# Altium PCB ECE453_PWR.PcbDoc
Units mil, origin at the board's own origin, x right, y up, seen from the top; angles counter-clockwise.
Board outline 1800 x 1300 mil, 2 copper layers (Top Layer, Bottom Layer); 19 components, 12 nets, 79 pads, 21 vias.
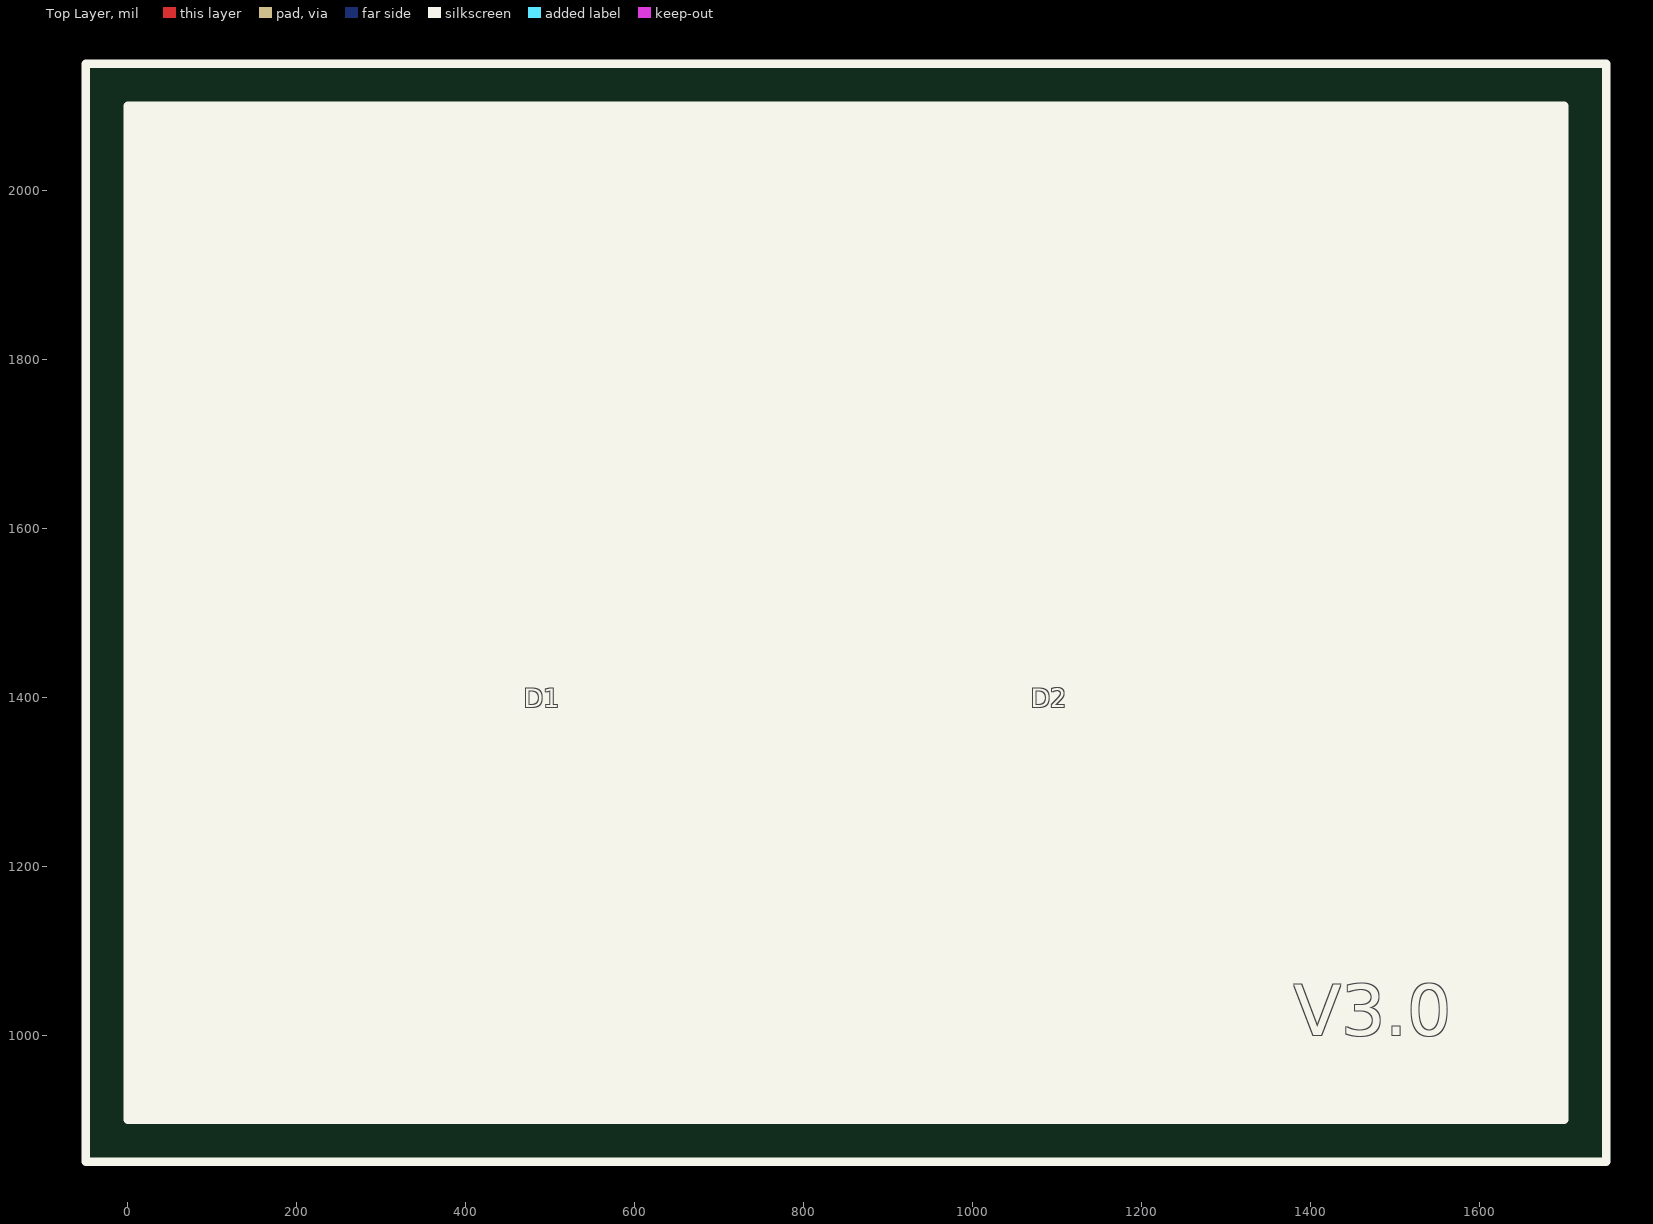
[diagram p0: Top Layer view]
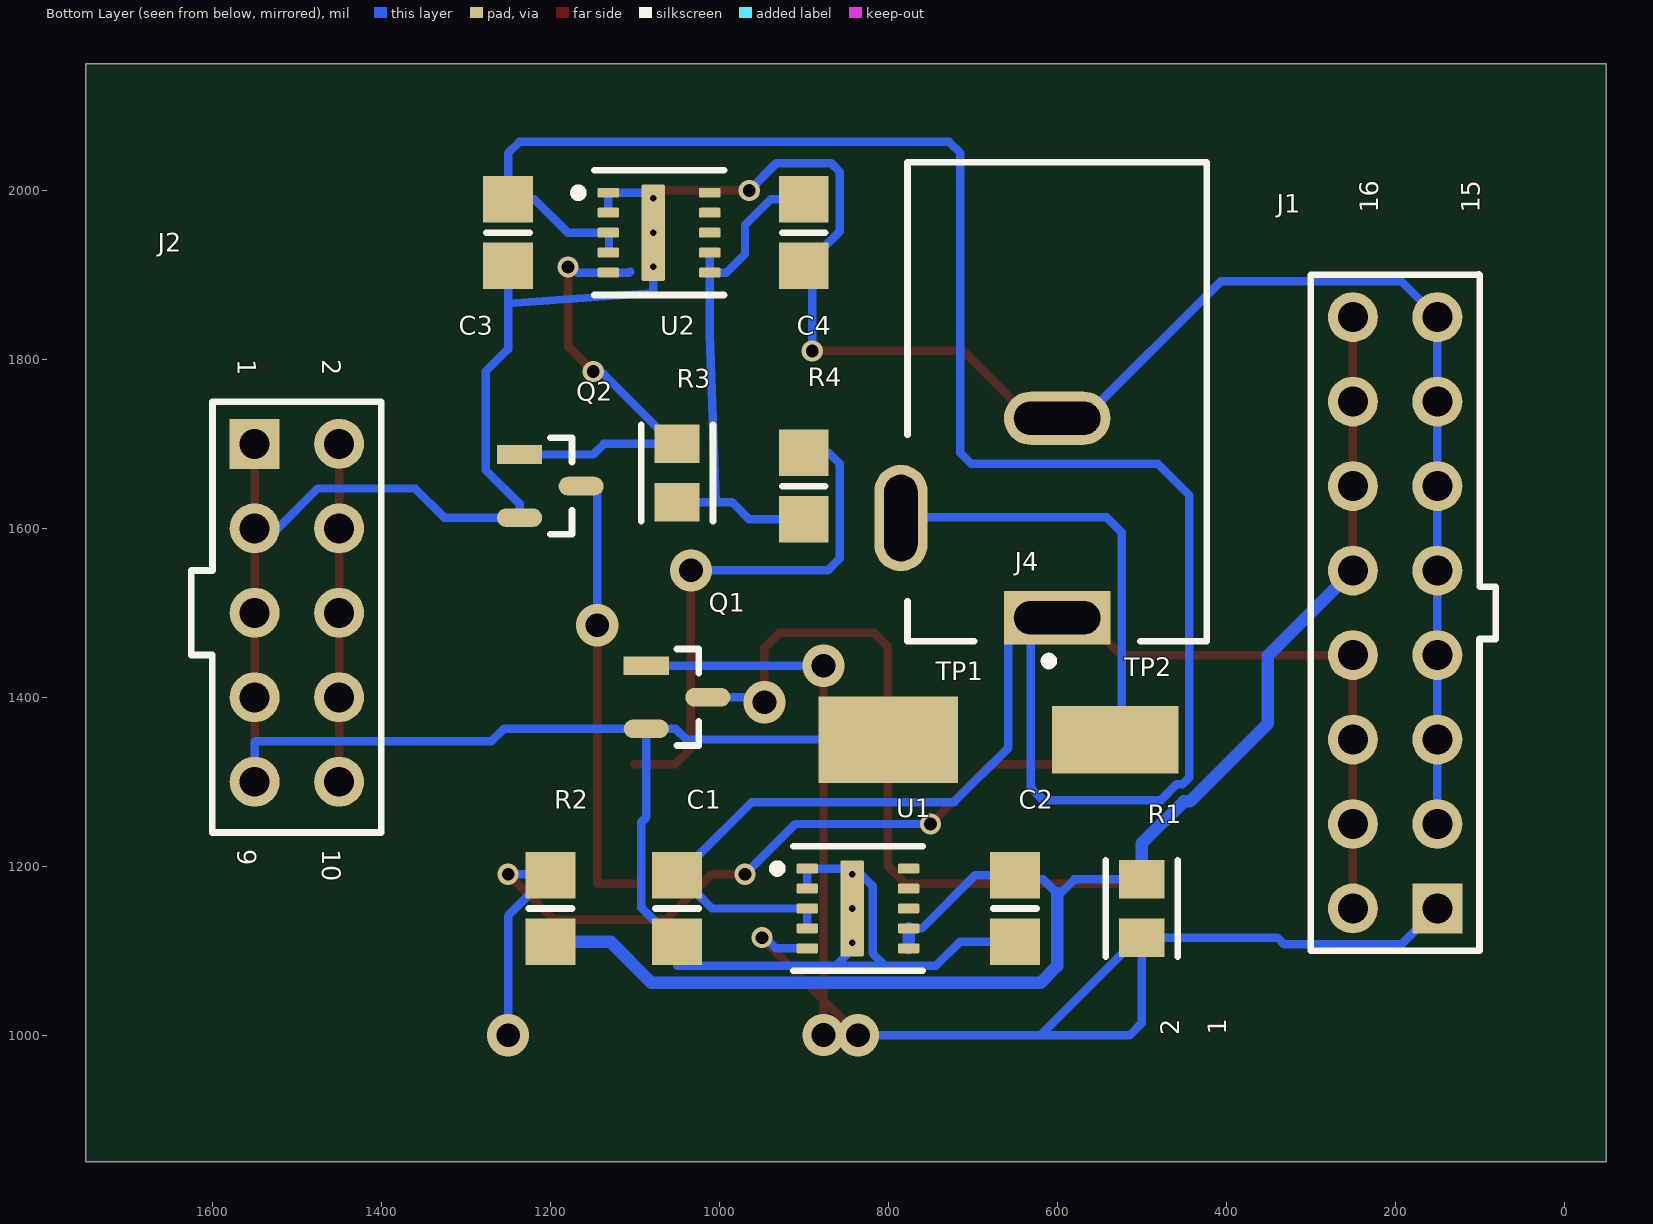
[diagram p1: Bottom Layer view, seen from below]
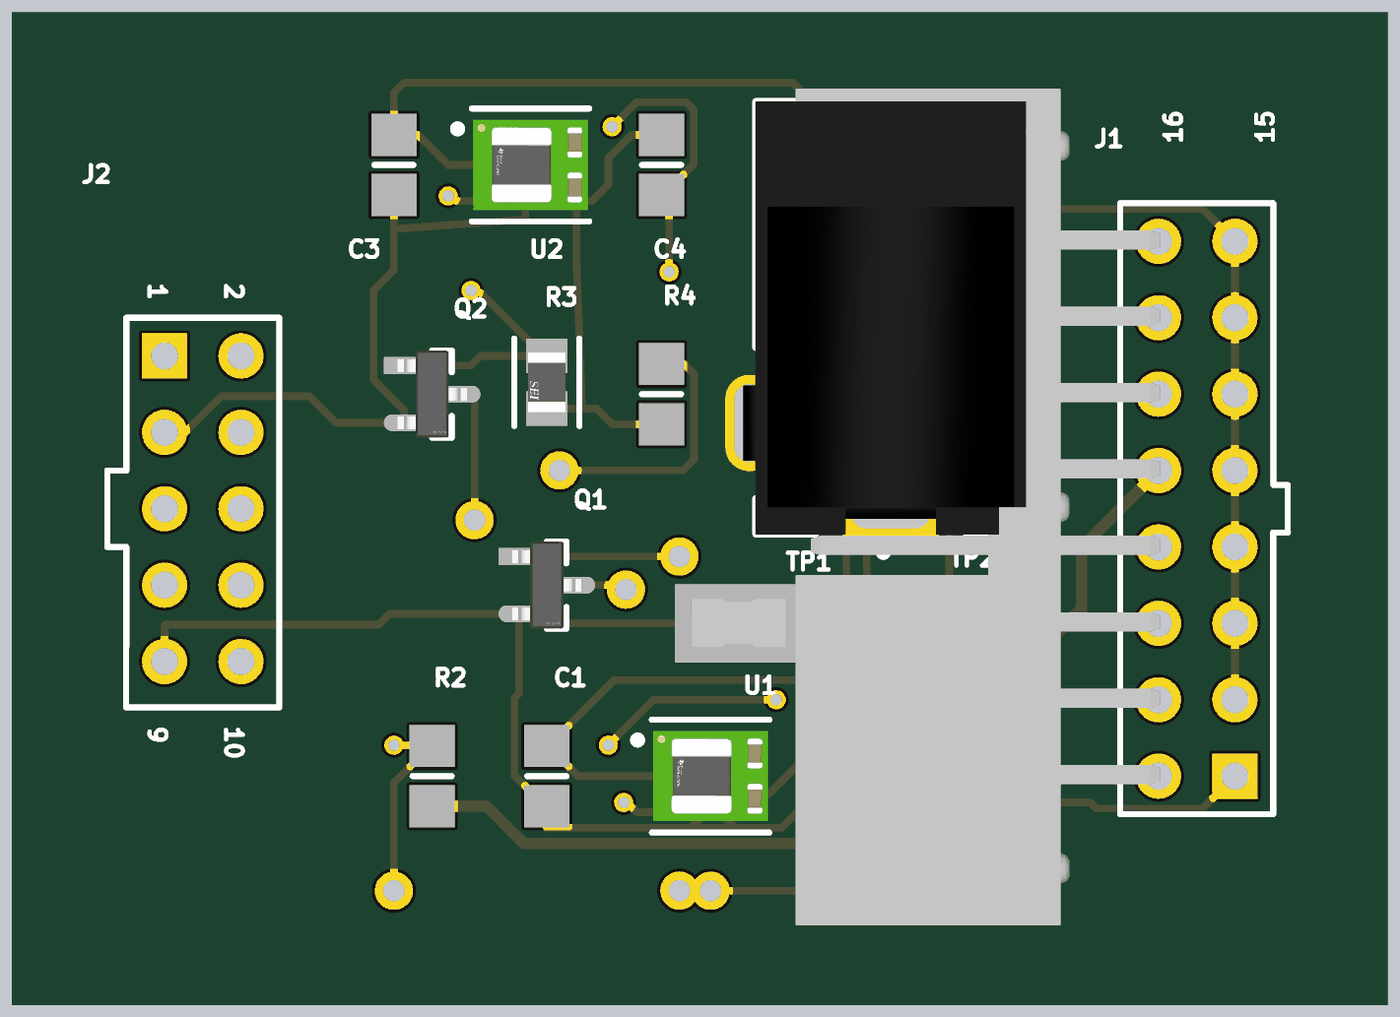
[diagram p2: 3D render of the assembled board from below, using the file's embedded part models]

## Layer stack, top to bottom
Top Solder: solder mask 0.4, Solder Resist, Dk 3.5
Top Layer: signal copper 1.4
Dielectric1: dielectric 12.6, FR-4, Dk 4.8
Bottom Layer: signal copper 1.4
Bottom Solder: solder mask 0.4, Solder Resist, Dk 3.5

## Board outline
-50,850 -50,2150 1750,2150 1750,850

## Design rules (kind name [scope] priority, off if disabled: settings)
Clearance Polygon_Clearance [All vs InPolygon] p1: gap=20 ignorepadtopadclearanceinfootprint=FALSE except(0: Arc-Hole Track-Hole SMDPad-Hole THPad-Hole Via-Hole Fill-Hole Poly-Hole Region-Hole Text-Hole)
Clearance [All] p2: gap=7.87 ignorepadtopadclearanceinfootprint=FALSE except(0: Arc-Hole Track-Hole SMDPad-Hole THPad-Hole Via-Hole Fill-Hole Poly-Hole Region-Hole Text-Hole)
ComponentClearance [InComponent('U3')] p1: gap=0 collisioncheckmode=3 verticalgap=10 showdistances=FALSE
Height [All] p1: minheight=0 maxheight=866.14 prefheight=500
HoleSize [All] p1: absolutevalues=TRUE maxlimit=250 minlimit=1.18 maxpercent=80.000 minpercent=20.000
MinimumSolderMaskSliver [All] p1: minsoldermaskwidth=7
NetAntennae NetAntennae_5.0V [InNet('5.0V')] p1: netantennaetolerance=0
NetAntennae NetAntennae_3.3V [InNet('3.3V')] p2: netantennaetolerance=0
PolygonConnect [IsNamedPolygon('5.0V_L01_P047') vs IsVia] p1: connectstyle=Relief reliefconductorwidth=10 reliefentries=4 polygonreliefangle="90 Angle" airgapwidth=10
PolygonConnect PolygonConnect_1 [All] p2: connectstyle=Relief reliefconductorwidth=10 reliefentries=4 polygonreliefangle="90 Angle" airgapwidth=10
RoutingVias [All] p1: holewidth=28 width=50 viastyle="Through Hole" minholewidth=15 minwidth=25 maxholewidth=28 maxwidth=50
SilkToSolderMaskClearance [IsPad] p1: minsilkscreentomaskgap=6 clearancetoexposedcopper=TRUE
SolderMaskExpansion [All] p1: expansion=4 istentingtop=FALSE
Width [All] p1: maxlimit=472.44 minlimit=3.94 preferedwidth=10 minimp=50.000000 maximp=50.000000 favimp=50.000000
24 further rules are at their usual default settings.

## Components (designator, comment, footprint, x,y, rotation, side; value= is the part's Value field where it differs from the comment)
C1 "Cap" 6-0805_M 1050,1150 r90 bottom value=10uF
C2 "Cap" 6-0805_M 650,1150 r90 bottom value=47uF
C3 "Cap" 6-0805_M 1250,1950 r90 bottom value=10uF
C4 "Cap" 6-0805_M 900,1950 r90 bottom value="47uF 2.1mOhm"
D1 "LTST-C230KGKT" Lite-On_LTST-C230KGKT_0 500,1250 r90 top
D2 "LTST-C230KGKT" Lite-On_LTST-C230KGKT_0 1100,1250 r90 top
J1 "CONN_HEADER_MALE_8x2" SBH11-PBPC-D08-ST-BK 200,1500 r90 bottom
J2 "CONN_HEADER_MALE_5x2" SBH11-PBPC-D05-ST-BK 1500,1500 r270 bottom
J4 "PJ-102AH" CUI_PJ-102AH_0 600,1750 r180 bottom
Q1 "2N7002NXAKR" Nexperia_USA_Inc_SOT23_IPC_B 1050,1400 r180 bottom
Q2 "2N7002NXAKR" Nexperia_USA_Inc_SOT23_IPC_B 1200,1650 r180 bottom
R1 "RMCF0805JG10K0" 0805 500,1150 r90 bottom
R2 "Res1" 6-0805_M 1200,1150 r270 bottom value=330
R3 "RMCF0805JG10K0" 0805 1050,1665.52 r270 bottom
R4 "Res1" 6-0805_M 900,1650 r270 bottom value=330
TP1 "TP_1206" TP-SMC-1206 800,1350 r180 bottom
TP2 "5019" KSTN-5019_V 531.5,1350 r0 bottom
U1 "LMZM23601V3SILT" Texas_Instruments_SIL0010A_MFG 835.83,1150 r180 bottom
U2 "LMZM23601V5SILT" Texas_Instruments_SIL0010A_MFG 1071.26,1950 r180 bottom

## Footprints (in the part's own frame and the unit in brackets; to place one, negate y for a bottom-side part, rotate by r counter-clockwise, add the part's x,y. Pads: shape width x height; smd on the part's side, far side on the other; paste and mask are expansions set on the pad)
6-0805_M [mm] "Chip Resistor, Body 2.0x1.2mm, IPC Low Density"
  rect 1.4x1.5 smd: 1(-1,0) 2(1,0)
  silkscreen extent 0,-0.65 0,0.65, body extent -1.07,-0.7 1.07,0.7, height 0.7
0805 [mil]
  rect 45.46x53.63 smd paste+0 mask+0: 1(-34.48,0) 2(34.48,0)
  silkscreen extent -57,-43 57,43, body extent -39,-25 39,25, height 26
CUI_PJ-102AH_0 [mm]
  rect 3.2x1.6 hole 1 slot 2.6 at 0 deg paste-1000 mask+0: 1(0,-6.5)
  oval 3.2x1.6 hole 1 slot 2.6 at 0 deg paste-1000 mask+0: 2(0,-0.5)
  oval 1.6x3.2 hole 2.6 slot 1 at 0 deg paste-1000 mask+0: 3(-4.7,-3.5)
  silkscreen extent -4.5,-7.92 4.5,7.2, body extent -4.9,-7.21 4.5,7.19, height 11.02
KSTN-5019_V [mm] "Test Point, 1-Leads, Body 3.81x2.03mm"
  rect 3.8x2.03 smd: 1(0,0)
  body extent -1.91,-1.02 1.9,1.02, height 2.29
Lite-On_LTST-C230KGKT_0 [mm]
  rect 1.5x1.6 smd paste+0 mask+0: 1(-1.8,0) 2(1.8,0)
  silkscreen extent -3.26,-0.8 0.5,0.8, body extent -1.6,-0.8 1.6,0.8, height 1.2
Nexperia_USA_Inc_SOT23_IPC_B [mm]
  rect 1.355x0.562 smd paste+0 mask+0: 1(-0.925,0.95)
  rrect100% 1.355x0.562 smd paste+0 mask+0: 2(-0.925,-0.95) 3(0.926,0)
  silkscreen extent 0,-1.45 0.65,1.45, body extent -1.15,-1.45 1.15,1.45, height 1.1
SBH11-PBPC-D05-ST-BK [mm] "Connector; Header; 5x2 Position"
  rect 1.5x1.5 hole 0.9: 1(-5.08,-1.27)
  round 1.5 hole 0.9: 2(-5.08,1.27) 3(-2.54,-1.27) 4(-2.54,1.27) 5(0,-1.27) 6(0,1.27) 7(2.54,-1.27) 8(2.54,1.27) 9(5.08,-1.27) 10(5.08,1.27)
  silkscreen extent -6.35,-3.18 6.6,2.54, body extent -10.1,-4.45 10.1,4.65, height 8.95
SBH11-PBPC-D08-ST-BK [mm] "Connector; Header; 8x2 Position"
  rect 1.5x1.5 hole 0.9: 1(-8.89,-1.27)
  round 1.5 hole 0.9: 2(-8.89,1.27) 3(-6.35,-1.27) 4(-6.35,1.27) 5(-3.81,-1.27) 6(-3.81,1.27) 7(-1.27,-1.27) 8(-1.27,1.27) 9(1.27,-1.27) 10(1.27,1.27) 11(3.81,-1.27) 12(3.81,1.27) 13(6.35,-1.27) 14(6.35,1.27) 15(8.89,-1.27) 16(8.89,1.27)
  silkscreen extent -10.16,-3.03 10.17,2.54, body extent -13.85,-4.47 13.97,4.63, height 9.3
Texas_Instruments_SIL0010A_MFG [mm]
  rrect33% 0.65x0.3 smd paste+0 mask+0: 1(-1.525,1.2) 2(-1.525,0.6) 3(-1.525,0) 4(-1.525,-0.6) 5(-1.525,-1.2) 6(1.525,-1.2) 7(1.525,-0.6) 8(1.525,0) 9(1.525,0.6) 10(1.525,1.2)
  rrect14% 0.7x2.9 smd paste-1000 mask+0: 11(-0.175,0)
  silkscreen extent -2.55,-1.87 1.95,1.88, body extent -1.9,-1.5 1.9,1.5, height 1.58
TP-SMC-1206 [mm] "Surface mount test point 1206"
  rect 4.2x2.6 smd mask+0: 1(0,0)
  body extent -1.57,-0.79 1.63,0.81, height 1.22

## Part data
C1 C3: "Capacitor", Supplier Part Number 1=399-4925-1-ND, LatestRevisionDate=17-Jul-2002, LatestRevisionNote="Re-released for DXP Platform.", PackageDescription="Radial Cap, Thru-Hole; 2 Leads; 0.3 in Pin Spacing", PackageReference=RAD-0.3, Published=8-Jun-2000, Publisher="Altium Limited", Supplier 1=Digi-Key
C2 C4: "Capacitor", Supplier Part Number 1=587-1779-1-ND, LatestRevisionDate=17-Jul-2002, LatestRevisionNote="Re-released for DXP Platform.", PackageDescription="Radial Cap, Thru-Hole; 2 Leads; 0.3 in Pin Spacing", PackageReference=RAD-0.3, Published=8-Jun-2000, Publisher="Altium Limited", Supplier 1=Digi-Key
D1 D2: "LED GREEN CLEAR CHIP SMD", Case Code (Imperial)=1206, Case Code (Metric)=3216, Color=Green, Forward Current=30mA, Forward Voltage=2V, Lens Color=Colorless, Manufacturer="Vishay Lite-On", Max Operating Temperature=85°C, Min Operating Temperature=-55°C, Package Quantity=1, Power Dissipation=75mW, Reverse Voltage=5V, Supplier Part Number 1=160-1456-1-ND, Test Current=20mA, Case/Package=1206, Category=LEDs, ComponentLink1Description=https://datasheet.ciiva.com/15118/getdatasheetpartid-214545-15118102.pdf?src-supplier=Verical, ComponentLink1URL=https://datasheet.ciiva.com/15118/getdatasheetpartid-214545-15118102.pdf?src-supplier=Verical, ComponentLink2Description=https://datasheet.ciiva.com/12400/lite-on-ltst-c230kgkt-190174-12400698.pdf?src-supplier=Mouser, ComponentLink2URL=https://datasheet.ciiva.com/12400/lite-on-ltst-c230kgkt-190174-12400698.pdf?src-supplier=Mouser, ComponentLink3Description=https://datasheet.ciiva.com/11773/0900766b80dc057a-11773900.pdf?src-supplier=RSComponents, ComponentLink3URL=https://datasheet.ciiva.com/11773/0900766b80dc057a-11773900.pdf?src-supplier=RSComponents, ComponentLink4Description=https://datasheet.ciiva.com/2110/s-110-ltst-c230kgkt-2110033.pdf?src-supplier=Digi-Key, ComponentLink4URL=https://datasheet.ciiva.com/2110/s-110-ltst-c230kgkt-2110033.pdf?src-supplier=Digi-Key, ComponentLink5Description=https://datasheet.ciiva.com/2110/s-110-ltst-c230kgkt-2110034.pdf?src-supplier=Digi-Key, ComponentLink5URL=https://datasheet.ciiva.com/2110/s-110-ltst-c230kgkt-2110034.pdf?src-supplier=Digi-Key, ComponentLink6Description=https://datasheet.ciiva.com/2110/s-110-ltst-c230kgkt-2110035.pdf?src-supplier=Digi-Key, ComponentLink6URL=https://datasheet.ciiva.com/2110/s-110-ltst-c230kgkt-2110035.pdf?src-supplier=Digi-Key, Depth=1.6mm, Dominant Wavelength=571nm, Height=1.1mm, Illumination Color=Green, Lead Free="Lead Free", Length=3.2mm, Lens Style=Diffused,Colorless,Clear,Rectangular, Lens Transparency=Clear, Luminous Intensity=35mcd, Manufacturer Part Number=LTST-C230KGKT, Mount="Surface Mount", Number of Elements=1, Number of LEDs=1, Number of Pins=2, Packaging="Tape and Reel", Power Rating=75mW, Pricing 1="1=0.31000, 10=0.16700, 100=0.07740, 500=0.07140, 1000=0.05593 (USD)", Radiation Hardening=No, RoHS=Yes, RoHS Compliant=Yes, Stock 1=244034, Supplier 1=Digi-Key, Viewing Angle=130°, Wavelength=574nm, Width=1.6mm
J1: "CONN HEADER 2.54MM 16POS GOLD", Color=Black, Manufacturer="Sullins Connector Solutions", Manufacturer Part Number=SBH11-PBPC-D08-ST-BK, Supplier Part Number 1=S9171-ND, Category="Connectors, Interconnects", ComponentLink1Description=http://sullinscorp.com/catalogs/145_PAGE118_.100_SBH11_SERIES_MALE_BOX_HDR_ST_RA_SMT.pdf, ComponentLink1URL=http://sullinscorp.com/catalogs/145_PAGE118_.100_SBH11_SERIES_MALE_BOX_HDR_ST_RA_SMT.pdf, Connector Type="Header, Shrouded", Contact Finish=Gold, Contact Finish Thickness=Flash, Contact Mating Length=-, Contact Type="Male Pin", Fastening Type=-, Features="Polarizing Key", Mounting Type="Through Hole", Number of Positions=16, Number of Positions Loaded=All, Number of Rows=2, Packaging=Tray, Part Status=Active, Pitch="0.100\" (2.54mm)", Pricing 1="1=0.55, 10=0.428, 25=0.3988, 50=0.3626, 100=0.3263, 250=0.27552, 500=0.261, 1000=0.232, 2500=0.19285 (USD)", RoHS="RoHS Compliant", Row Spacing="0.100\" (2.54mm)", Stock 1=13784, Supplier 1=Digi-Key, Termination=Solder
J2: "CONN HEADER 2.54MM 10POS GOLD", Color=Black, Manufacturer="Sullins Connector Solutions", Manufacturer Part Number=SBH11-PBPC-D05-ST-BK, Supplier Part Number 1=S9169-ND, Category="Connectors, Interconnects", ComponentLink1Description=http://sullinscorp.com/catalogs/145_PAGE118_.100_SBH11_SERIES_MALE_BOX_HDR_ST_RA_SMT.pdf, ComponentLink1URL=http://sullinscorp.com/catalogs/145_PAGE118_.100_SBH11_SERIES_MALE_BOX_HDR_ST_RA_SMT.pdf, Connector Type="Header, Shrouded", Contact Finish=Gold, Contact Finish Thickness=Flash, Contact Mating Length=-, Contact Type="Male Pin", Fastening Type=-, Features="Polarizing Key", Mounting Type="Through Hole", Number of Positions=10, Number of Positions Loaded=All, Number of Rows=2, Packaging=Tray, Part Status=Active, Pitch="0.100\" (2.54mm)", Pricing 1="1=0.64, 10=0.445, 25=0.3812, 50=0.343, 100=0.2985, 250=0.254, 500=0.2413, 1000=0.2159, 2500=0.17145 (USD)", RoHS="RoHS Compliant", Row Spacing="0.100\" (2.54mm)", Stock 1=29227, Supplier 1=Digi-Key, Termination=Solder
J4: "2.0 x 6.5 mm, 5.0 A, Horizontal, Through Hole, Tapered Pins, Dc Power Jack Connector", Color=Black, Current Rating=5A, Flammability Rating="UL94 V-0", Insulation Resistance=50MR, Manufacturer=CUI, Max Operating Temperature=85°C, Min Operating Temperature=-25°C, Package Quantity=280, Supplier Part Number 1=490-PJ-102AH, Voltage Rating=24V, Category=Connectors, ComponentLink1Description=http://www.mouser.com/ds/2/670/PJ-102AH-524179.pdf?src-supplier=Mouser, ComponentLink1URL=http://www.mouser.com/ds/2/670/PJ-102AH-524179.pdf?src-supplier=Mouser, ComponentLink2Description=https://www.cui.com/product/resource/digikeypdf/pj-102ah.pdf?src-supplier=Digi-Key, ComponentLink2URL=https://www.cui.com/product/resource/digikeypdf/pj-102ah.pdf?src-supplier=Digi-Key, ComponentLink3Description=http://www.cui.com/Product/Resource/FuturePDF/PJ-102AH.pdf?src-supplier=Future+Electronics, ComponentLink3URL=http://www.cui.com/Product/Resource/FuturePDF/PJ-102AH.pdf?src-supplier=Future+Electronics, Connector Type=Jack, Contact Gender=Male, Contact Material=Copper, Contact Plating=Nickel, Diameter=2.1mm, Gender=Male, Housing Color=Black, Housing Material=Thermoplastic, Lead Free="Lead Free", Manufacturer Part Number=PJ-102AH, Mount="Through Hole", Number of Conductors=2, Orientation=Horizontal, Packaging=Bulk, RoHS=Yes, RoHS Compliant=Yes, Series=-, Shielding=Unshielded, Supplier 1=Mouser, Termination="Through Hole"
Q1 Q2: "2N7002NXAK - 60 V, single N-channel Trench MOSFET", Manufacturer=Nexperia, Supplier Part Number 1=1727-8643-1-ND, Manufacturer Part Number=2N7002NXAKR, Pricing 1="1=0.10000, 10=0.05600, 25=0.05360, 100=0.03030, 500=0.02380, 1000=0.01653 (USD)", RoHS=No, Stock 1=74376, Supplier 1=Digi-Key
R1 R3: "Res Thick Film 0805 10K Ohm 5% 1/8W ±200ppm/°C Molded SMD Paper T/R", Case Code (Imperial)=0805, Case Code (Metric)=2012, Manufacturer="Stackpole Electronics", Max Operating Temperature=155°C, Max Power Dissipation=125mW, Min Operating Temperature=-55°C, Package Quantity=10000, Resistance=10kR, Resistor Type="Thick Film", Supplier Part Number 1=RMCF0805JG10K0CT-ND, Temperature Coefficient=200ppm/°C, Tolerance=5%, Case/Package=0805, Category="Chip SMD Resistors", ComponentLink1Description=https://www.seielect.com/catalog/SEI-Packaging.pdf?src-supplier=Digi-Key, ComponentLink1URL=https://www.seielect.com/catalog/SEI-Packaging.pdf?src-supplier=Digi-Key, ComponentLink2Description=https://www.seielect.com/Catalog/SEI-RMCF_RMCP.pdf?src-supplier=Digi-Key, ComponentLink2URL=https://www.seielect.com/Catalog/SEI-RMCF_RMCP.pdf?src-supplier=Digi-Key, ComponentLink3Description=http://www.seielect.com/Catalog/SEI-RMCF_RMCP.pdf?src-supplier=Digi-Key, ComponentLink3URL=http://www.seielect.com/Catalog/SEI-RMCF_RMCP.pdf?src-supplier=Digi-Key, ComponentLink4Description=https://www.seielect.com/catalog/SEI-RMCF_RMCP.pdf?src-supplier=Avnet, ComponentLink4URL=https://www.seielect.com/catalog/SEI-RMCF_RMCP.pdf?src-supplier=Avnet, ComponentLink5Description=http://components.arrow.com/part/dataview/40965385S7746077N1174?src-supplier=Arrow+Electronics, ComponentLink5URL=http://components.arrow.com/part/dataview/40965385S7746077N1174?src-supplier=Arrow+Electronics, Contact Plating=Tin,Matte, Features="Automotive AEC-Q200", Height=0.026inch, Length=0.079inch, Manufacturer Part Number=RMCF0805JG10K0, Mount="Surface Mount", Number of Terminations=2, Packaging="Tape and Reel", Pricing 1="1=0.10000, 10=0.01900, 100=0.00780, 1000=0.00350, 2500=0.00304, 5000=0.00251 (USD)", Radiation Hardening=No, RoHS=Yes, RoHS Compliant=Yes, Series=RMCF, Stock 1=126198, Supplier 1=Digi-Key, Width=0.049inch
R2 R4: "SMD Chip Resistor, 0805 [2012 Metric], 330 kohm, ERJ6EN Series, 150 V, Thick Film, 125 mW", Case Code (Imperial)=0805, Case Code (Metric)=2012, Manufacturer=Panasonic, Manufacturer Part Number=ERJ6ENF3303V, Max Operating Temperature=155°C, Max Power Dissipation=125mW, Min Operating Temperature=-55°C, Package Quantity=1, Resistance=330kR, Resistance Tolerance=1%, Resistor Type="Thick Film", Supplier Part Number 1=P330KCCT-ND, Temperature Coefficient=100ppm/°C, Voltage Rating=150V, Case/Package=0805, Category="Chip SMD Resistors", ComponentLink1Description=https://datasheet.ciiva.com/11821/0900766b80f80784-11821637.pdf?src-supplier=RSComponents, ComponentLink1URL=https://datasheet.ciiva.com/11821/0900766b80f80784-11821637.pdf?src-supplier=RSComponents, ComponentLink2Description=https://datasheet.ciiva.com/9183/aoa0000ce2-9183029.pdf?src-supplier=Avnet, ComponentLink2URL=https://datasheet.ciiva.com/9183/aoa0000ce2-9183029.pdf?src-supplier=Avnet, ComponentLink3Description=https://datasheet.ciiva.com/24026/aoa0000ce2-24026247.pdf?src-supplier=Mouser, ComponentLink3URL=https://datasheet.ciiva.com/24026/aoa0000ce2-24026247.pdf?src-supplier=Mouser, ComponentLink4Description=https://datasheet.ciiva.com/46420/1678782-46420183.pdf?src-supplier=Element14, ComponentLink4URL=https://datasheet.ciiva.com/46420/1678782-46420183.pdf?src-supplier=Element14, ComponentLink5Description=https://datasheet.ciiva.com/7836/426256-7836824.pdf?src-supplier=Element14, ComponentLink5URL=https://datasheet.ciiva.com/7836/426256-7836824.pdf?src-supplier=Element14, ComponentLink6Description=https://datasheet.ciiva.com/17206/aoa0000ce2-17206265.pdf?src-supplier=Avnet+Europe, ComponentLink6URL=https://datasheet.ciiva.com/17206/aoa0000ce2-17206265.pdf?src-supplier=Avnet+Europe, ComponentLink7Description=https://datasheet.ciiva.com/16761/70260748-16761642.pdf?src-supplier=Allied+Electronics, ComponentLink7URL=https://datasheet.ciiva.com/16761/70260748-16761642.pdf?src-supplier=Allied+Electronics, ComponentLink8Description=https://datasheet.ciiva.com/7836/426256-7836539.pdf?src-supplier=Element14, ComponentLink8URL=https://datasheet.ciiva.com/7836/426256-7836539.pdf?src-supplier=Element14, ComponentLink9Description=https://datasheet.ciiva.com/5915/426256-5915341.pdf?src-supplier=Farnell, ComponentLink9URL=https://datasheet.ciiva.com/5915/426256-5915341.pdf?src-supplier=Farnell, ComponentLink10Description=https://datasheet.ciiva.com/16765/70260748-16765294.pdf?src-supplier=Allied+Electronics, ComponentLink10URL=https://datasheet.ciiva.com/16765/70260748-16765294.pdf?src-supplier=Allied+Electronics, ComponentLink11Description=https://datasheet.ciiva.com/22673/1678782-22673294.pdf?src-supplier=Element14, ComponentLink11URL=https://datasheet.ciiva.com/22673/1678782-22673294.pdf?src-supplier=Element14, ComponentLink12Description=https://datasheet.ciiva.com/22687/1678782-22687438.pdf?src-supplier=Element14, ComponentLink12URL=https://datasheet.ciiva.com/22687/1678782-22687438.pdf?src-supplier=Element14, Construction=Rectangular, Contact Plating=Tin, Depth=1.25mm, Features="Automotive AEC-Q200", Height=0.6mm, LatestRevisionDate=17-Jul-2002, LatestRevisionNote="Re-released for DXP Platform.", Length=2mm, Military Standard=Not, Mount="Surface Mount", Number of Pins=2, Number of Terminations=2, PackageDescription="Axial Device, Thru-Hole; 2 Leads; 0.3 in Pin Spacing", PackageReference=AXIAL-0.3, Packaging="Tape and Reel", Power Rating=125mW, Pricing 1="1=0.10000, 10=0.07200, 100=0.02750, 1000=0.01210, 2500=0.01045 (USD)", Published=8-Jun-2000, Publisher="Altium Limited", Radiation Hardening=No, REACH SVHC="No SVHC", RoHS=Yes, RoHS Compliant=Yes, Series=ERJ, Stock 1=9622, Supplier 1=Digi-Key, Technology="THICK FILM", Termination=SMD/SMT, Tolerance=1%, Width=0.049inch
TP1: "Test Point SMD 1206", Supplier Part Number 1=A106143CT-ND, Supplier 1=Digi-Key
TP2: "Test Point, 1 Position SMD, RoHS, Tape and Reel", Package Quantity=1000, ComponentLink1Description="Manufacturer URL", ComponentLink1URL=http://www.keyelco.com/, ComponentLink2Description=Datasheet, ComponentLink2URL=http://www.keyelco.com/product-pdf.cfm?p=1357, Contact Plating=Silver, DatasheetVersion=03/2014, Mount="Surface Mount", Mounting Technology="Surface Mount", PackageDescription="1-Pin Surface Mount Device, Body 3.81 x 2.03 mm", PackageReference=5019, Packaging="Tape and Reel", PartNumber=5019, Pins=1, RoHSCompliant=True
U1: "TEXAS INSTRUMENTS - LMZM23601V3SILT . - Convertidor DC/DC POL no Aislado, ITE, 1 Salida, 3 W, 3 V, 1 A, Fijo", Manufacturer="Texas Instruments", Max Input Voltage=36V, Max Operating Temperature=125°C, Max Output Current=1A, Min Input Voltage=4V, Min Operating Temperature=-40°C, Supplier Part Number 1=296-49461-1-ND, Voltage - Output 1=3.3V, Category="Voltage Regulators - Switching", ComponentLink1Description=http://www.ti.com/lit/ds/symlink/lmzm23601.pdf?src-supplier=Digi-Key, ComponentLink1URL=http://www.ti.com/lit/ds/symlink/lmzm23601.pdf?src-supplier=Digi-Key, ComponentLink2Description=http://www.ti.com/lit/ds/symlink/lmzm23601.pdf?src-supplier=Farnell, ComponentLink2URL=http://www.ti.com/lit/ds/symlink/lmzm23601.pdf?src-supplier=Farnell, Efficiency=81%, Features=UVLO,OCP,SCP, Manufacturer Part Number=LMZM23601V3SILT, Mount="Surface Mount", Number of Outputs=1, Packaging="Cut Tape", Pricing 1="1=6.54000, 10=5.87300, 25=5.55240, 100=4.56520 (USD)", RoHS=Yes, RoHS Compliant=Yes, Stock 1=689, Supplier 1=Digi-Key
U2: "TEXAS INSTRUMENTS - LMZM23601V5SILT - Non Isolated POL DC/DC Converter, 1 Output, 5 W, 5 V, 1 A, Fixed", Manufacturer="Texas Instruments", Max Input Voltage=36V, Max Operating Temperature=125°C, Max Output Current=1A, Min Input Voltage=4V, Min Operating Temperature=-40°C, Supplier Part Number 1=296-49462-1-ND, Voltage - Output 1=5V, Category="Voltage Regulators - Switching", ComponentLink1Description=http://www.ti.com/lit/ds/symlink/lmzm23601.pdf?src-supplier=Farnell, ComponentLink1URL=http://www.ti.com/lit/ds/symlink/lmzm23601.pdf?src-supplier=Farnell, ComponentLink2Description=http://www.ti.com/lit/ds/symlink/lmzm23601.pdf?src-supplier=Digi-Key, ComponentLink2URL=http://www.ti.com/lit/ds/symlink/lmzm23601.pdf?src-supplier=Digi-Key, Efficiency=87%, Features=UVLO,OCP,SCP, Manufacturer Part Number=LMZM23601V5SILT, Mount="Surface Mount", Number of Outputs=1, Packaging="Tape and Reel", Pricing 1="1=6.54000, 10=5.87300, 25=5.55240, 100=4.56520 (USD)", RoHS=Yes, Stock 1=2317, Supplier 1=Digi-Key

## Via types
v1: diameter 25, hole 15, Top Layer to Bottom Layer, 8 vias
v2: diameter 50, hole 28, Top Layer to Bottom Layer, 7 vias
v3: diameter 19.68, hole 7.87, Top Layer to Bottom Layer, 6 vias

## Nets (pads, with @x,y where several pads share a name; then routed paths per layer and width w, separated by ;. In a path a pad name is that pad's centre, name@x,y a point inside that pad or via, vN(x,y) a via of type N, cw(c..) or ccw(c..) an arc to the next point about the centre after c; other vN are vias at no path point)
3.3V: C2.2 J1.10 J1.12 J1.14 J1.16 R1.2 R2.2 U1.6 U1.7 | length 1830.5
  Top Layer w10: J1.10 J1.12 J1.14 J1.16
  Bottom Layer w10: R1.2 579.69,1184.48 600,1164.17 ; 600,1167.94 616.54,1184.48 C2.2@645.11,1184.48 ; C2.2 697.11,1189.37 760.11,1126.38 U1.7
  Bottom Layer w15: J1.10 350.68,1449.32 350.68,1369.04 442.92,1276.79 450,1276.79 500,1226.79 R1.2 ; 600,1167.94 600,1164.17 600,1081.8 619.79,1062.01 1080.21,1062.01 1128.83,1110.63 R2.2 ; C2.2@645.11,1184.48 C2.2 ; U1.6 U1.7
5.0V: J2.2 J2.4 J2.6 J2.8 J2.10 | length 400
  Top Layer w10: J2.10 J2.8 J2.6 J2.4 J2.2
5V: C4.2 R3.2 R4.2 U2.6 U2.7 | length 621.1
  Bottom Layer w10: R4.2 964.54,1610.63 984.95,1631.04 1004.04,1631.04 ; C4.2 939.28,1989.37 969.54,1959.12 969.54,1924.76 991.54,1902.76 U2.6 ; U2.7 U2.6 ; R3.2 1004.04,1631.04 ; 1004.04,1631.04 1011.22,1829.17 U2.6
12V: C1.2 C3.2 J1.2 J1.4 J1.6 J1.8 J4.1 U1.3 U1.4 U2.3 U2.4 | length 3662.9
  Top Layer w10: J1.2 J1.4 J1.6 J1.8 524.41,1450 568.5,1494.09 J4.1
  Bottom Layer w10: J4.1 J4.1@631.5,1494.09 ; U1.4 U1.3 1008.66,1150 1029.04,1170.38 C1.2@1029.04,1189.37 ; C1.2 C1.2@1029.04,1189.37 ; U2.4 1130.54,1926.38 1130.54,1950 U2.3 1179.36,1950 1218.73,1989.37 C3.2 1250,2044.14 1236.64,2057.5 727.89,2057.5 714.54,2044.14 714.54,1689.17 702.04,1676.67 481.04,1676.67 443.82,1639.46 443.82,1304.71 451.36,1297.16 458.44,1297.16 477.43,1278.17 616.54,1278.17 631.54,1293.17 J4.1@631.5,1494.09 ; J4.1@631.5,1494.09 657.99,1467.6 657.99,1339.94 722,1275.94 961.46,1275.94 1029.04,1208.36 C1.2@1029.04,1189.37
GND: C1.1 C2.1 C3.1 C4.1 J1.3 J1.5 J1.7 J1.9 J1.11 J1.13 J1.15 J2.1 J2.3 J2.5 J2.7 J2.9 J4.2 Q1.2 Q2.2 TP1.1 U1.1 U1.2 U1.11 U2.1 U2.2 U2.11 | length 5094.3
  Top Layer w10: J4.2 631.5,1730.32 711.18,1810 v1(890,1810) ; v1(964.54,2000) 1066.08,2000 1075.53,1990.55 v3(1078.15,1990.55) ; J2.9 J2.7 J2.5 J2.3 J2.1
  Bottom Layer w10: J1.3 J1.5 J1.7 J1.9 J1.11 J1.13 J1.15 192.4,1892.4 406.42,1892.4 568.5,1730.32 J4.2 ; C2.1 715.25,1110.63 743.5,1082.38 804.04,1082.38 ; TP1.1 1038.94,1350 1051.54,1362.6 Q1.2 ; U1.11@840.87,1107.6 841.63,1107.23 842.72,1106.69 842.72,1101.67 862.01,1082.38 ; v1(890,1810) 890,1902.6 898.03,1910.63 857.6,1951.06 857.6,2022.26 867.46,2032.13 932.54,2032.13 964.54,2000.13 v1(964.54,2000) ; U1.2 U1.1 839.11,1197.24 818.54,1176.67 818.54,1096.88 804.04,1082.38 ; v3(1078.15,1950) v3(1078.15,1909.45) 1078.15,1878.56 1250,1866.17 ; v3(1078.15,1990.55) 1084.84,1997.24 U2.1 U2.2 ; C3.1 1250,1866.17 ; J2.9 1550,1347.17 1549,1348.17 1269.54,1348.17 1255.11,1362.6 Q1.2 ; J2.3 1522.71,1600 1475.54,1647.17 1360.11,1647.17 1325.54,1612.6 Q2.2 1236.44,1629.07 1276.54,1669.17 1276.54,1785.64 1250,1812.17 1250,1866.17 ; 804.04,1082.38 862.01,1082.38 ; 862.01,1082.38 1050,1082.38 C1.1 1051.97,1110.63 1092.4,1151.06 1092.4,1252.03 1086.44,1257.99 Q1.2
  other v3: 842.72,1109.45 842.72,1150 842.72,1190.55
NetQ2_1: Q2.1 R3.1 U2.5 | length 531.2
  Top Layer w10: v1(1149.13,1785.64) 1179.04,1815.54 v1(1179.04,1909.45)
  Bottom Layer w10: R3.1 R3.1@1063.5,1700 ; 1105.54,1903.76 1106.54,1902.76 U2.5 1168.28,1902.76 1174.98,1909.45 v1(1179.04,1909.45) ; v1(1149.13,1785.64) 1146.26,1782.77 1136.85,1782.77 1063.5,1709.41 R3.1@1063.5,1700 ; Q2.1 1149.13,1687.4 1136.54,1700 R3.1@1063.5,1700
PG5_LED_FET: D2.1 Q2.3 | length 533.8
  Top Layer w10: D2.1 1143.54,1179.13 1144.54,1180.13 v2(1144.54,1485.17)
  Bottom Layer w10: v2(1144.54,1485.17) 1144.54,1650 Q2.3
PG5_Res_LED: D2.2 R4.1 | length 627.1
  Top Layer w10: v2(1033.54,1550.17) 1033.54,1339.17 1051.84,1320.87 D2.2
  Bottom Layer w10: R4.1 870.23,1689.37 857.54,1676.67 857.54,1564.17 871.54,1550.17 v2(1033.54,1550.17)
PGOOD3_Connect: D1.1 Q1.3 | length 862.8
  Top Layer w10: D1.1 779.04,1179.13 800.54,1200.63 800.54,1460.17 816.54,1476.17 929.04,1476.17 946.54,1458.67 v2(946.54,1394.17)
  Bottom Layer w10: v2(946.54,1394.17) 952.36,1400 Q1.3
PGOOD_Connect: D1.2 R2.1 | length 1106.3
  Top Layer w10: D1.2 679.13,1320.87 v1(750,1250) ; v1(969.54,1190.55) 1009.35,1190.55 1063.17,1136.73 1196.18,1136.73 v1(1250,1190.55)
  Bottom Layer w10: v1(750,1250) 910.09,1250 v1(969.54,1190.55) ; v2(1250,1000) 1250,1141.34 1201.97,1189.37 1203.15,1190.55 v1(1250,1190.55)
PWR_GOOD_3P3: J1.1 Q1.1 R1.1 U1.5 | length 2106.4
  Top Layer w10: v2(835.83,1000) 835.83,1000.67 876.61,1041.46 ; v2(876.61,1000.17) 876.61,1041.46 ; v2(876.61,1437.4) 876.61,1041.46 ; v1@950,1114.85 876.61,1041.46
  Bottom Layer w10: J1.1 192.4,1107.6 331.33,1107.6 339.26,1115.52 R1.1 ; v2(835.83,1000) 619.6,1000 619.43,1000.17 ; v2(876.61,1000.17) 619.43,1000.17 ; v2(876.61,1437.4) Q1.1 ; U1.5 932.67,1102.76 945.43,1115.52 v1(949.49,1115.52) ; R1.1 504.08,1115.52 619.43,1000.17 ; R1.1 500,1014.17 514,1000.17 619.43,1000.17
WORT_SWITCH: J4.3 TP2.1 | length 523.1
  Bottom Layer w10: TP2.1 523.54,1350 523.54,1595.17 541.54,1613.17 785.04,1613.17 J4.3
pads on no net: U1.8 U1.9 U1.10 U2.8 U2.9 U2.10

## Polygon pours and split planes (outlines as drawn)
GND on Top Overlay "NONET_L-01_P-001" (solid, shelved): 0,2100 1700,2100 1700,900 0,900

## Silkscreen, mask and mechanical layers (free items; w line width, h text height)
Top Overlay:
  circle w118.11: c600,1900 r50
  lines w10: -50,850 1750,850 1750,2150 -50,2150 -50,850 ; 0,900 0,2100 1700,2100 1700,900 0,900
  text "V3.0" at 1380,1000 h60
Mechanical 9:
  the board outline again, w10

## Text inside footprints (layer, text, board x,y; h text height)
J1: Bottom Overlay "2" at 455.54,1000 h22 r270; Bottom Overlay "1" at 400,1000.67 h22 r270; Bottom Overlay "15" at 100,1973.62 h22 r270; Bottom Overlay "16" at 220,1973.62 h22 r270
J2: Bottom Overlay "10" at 1470,1220 h22 r90; Bottom Overlay "9" at 1570,1220 h22 r90; Bottom Overlay "1" at 1570,1800 h22 r90; Bottom Overlay "2" at 1470,1800 h22 r90